# Altium PCB Flight_Controller.PcbDoc
Units mil, origin at the board's own origin, x right, y up, seen from the top; angles counter-clockwise.
Board outline 1575 x 1575 mil, 2 copper layers (Top Layer, Bottom Layer); 38 components, 43 nets, 192 pads, 140 vias.
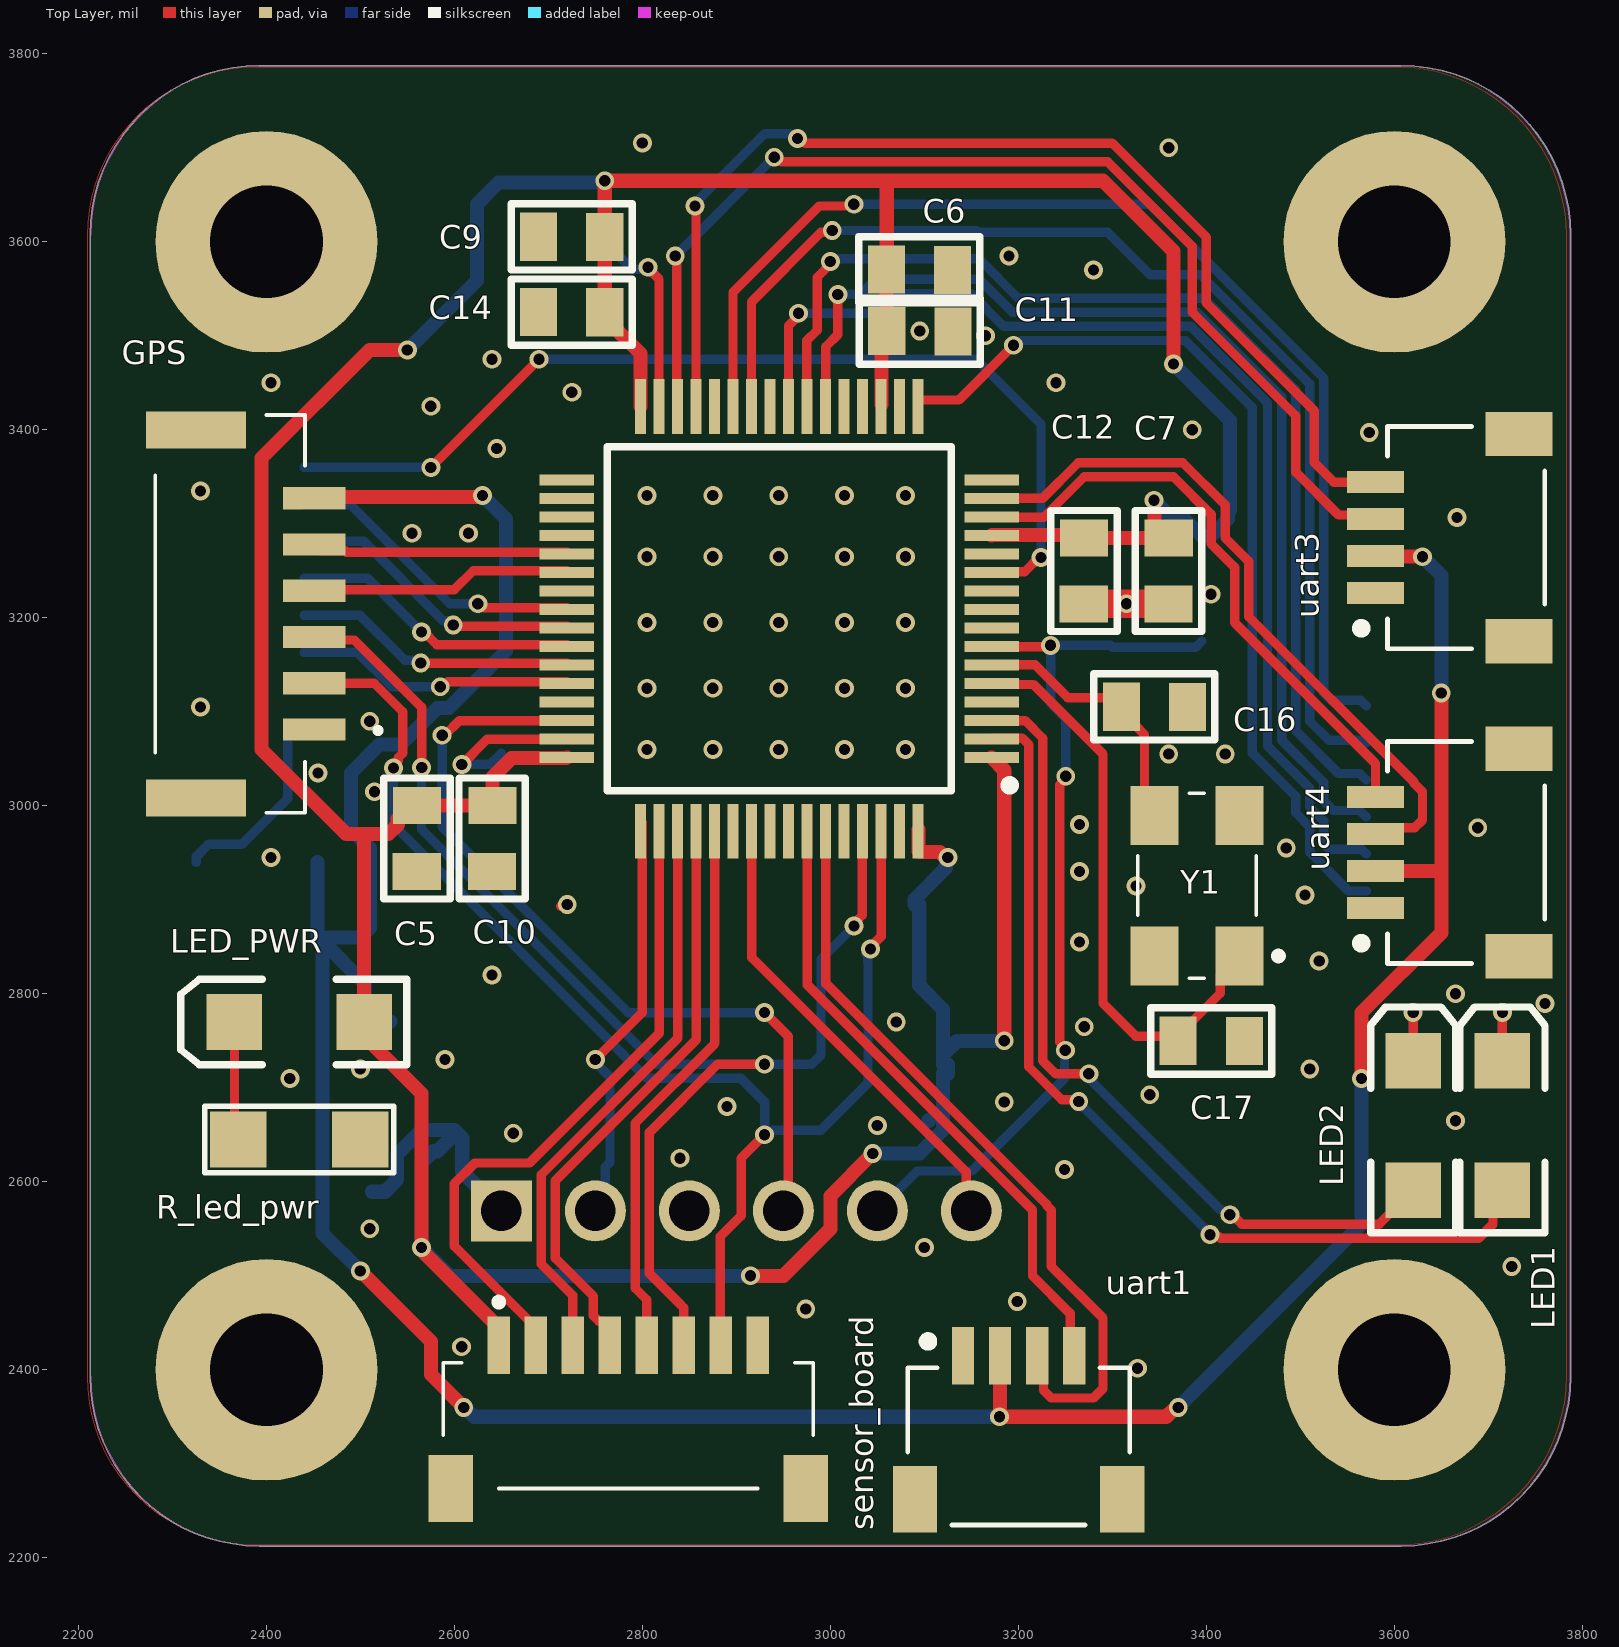
[diagram p0: Top Layer view]
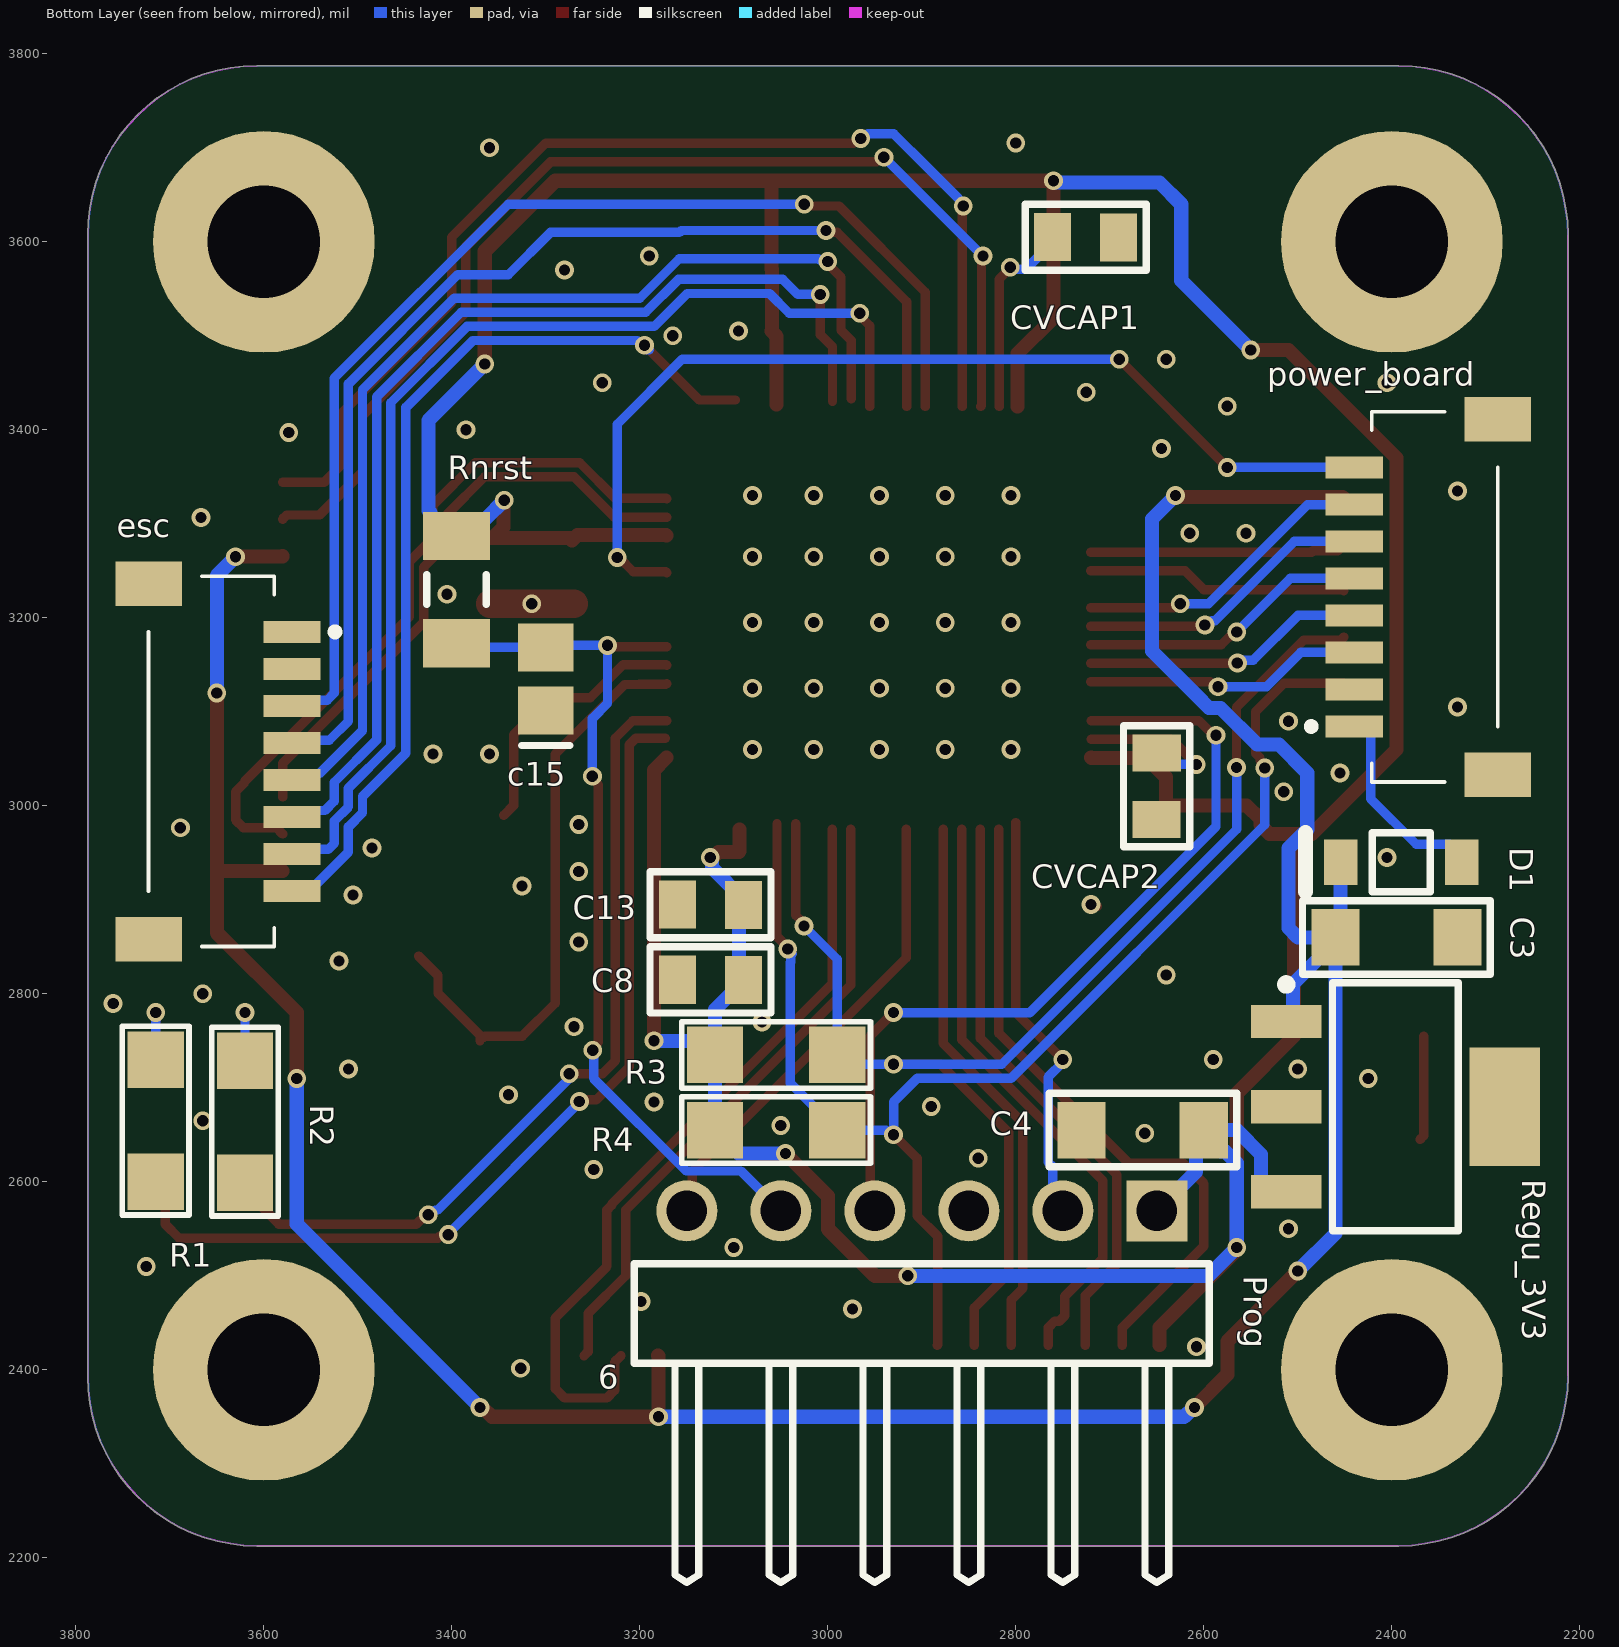
[diagram p1: Bottom Layer view, seen from below]
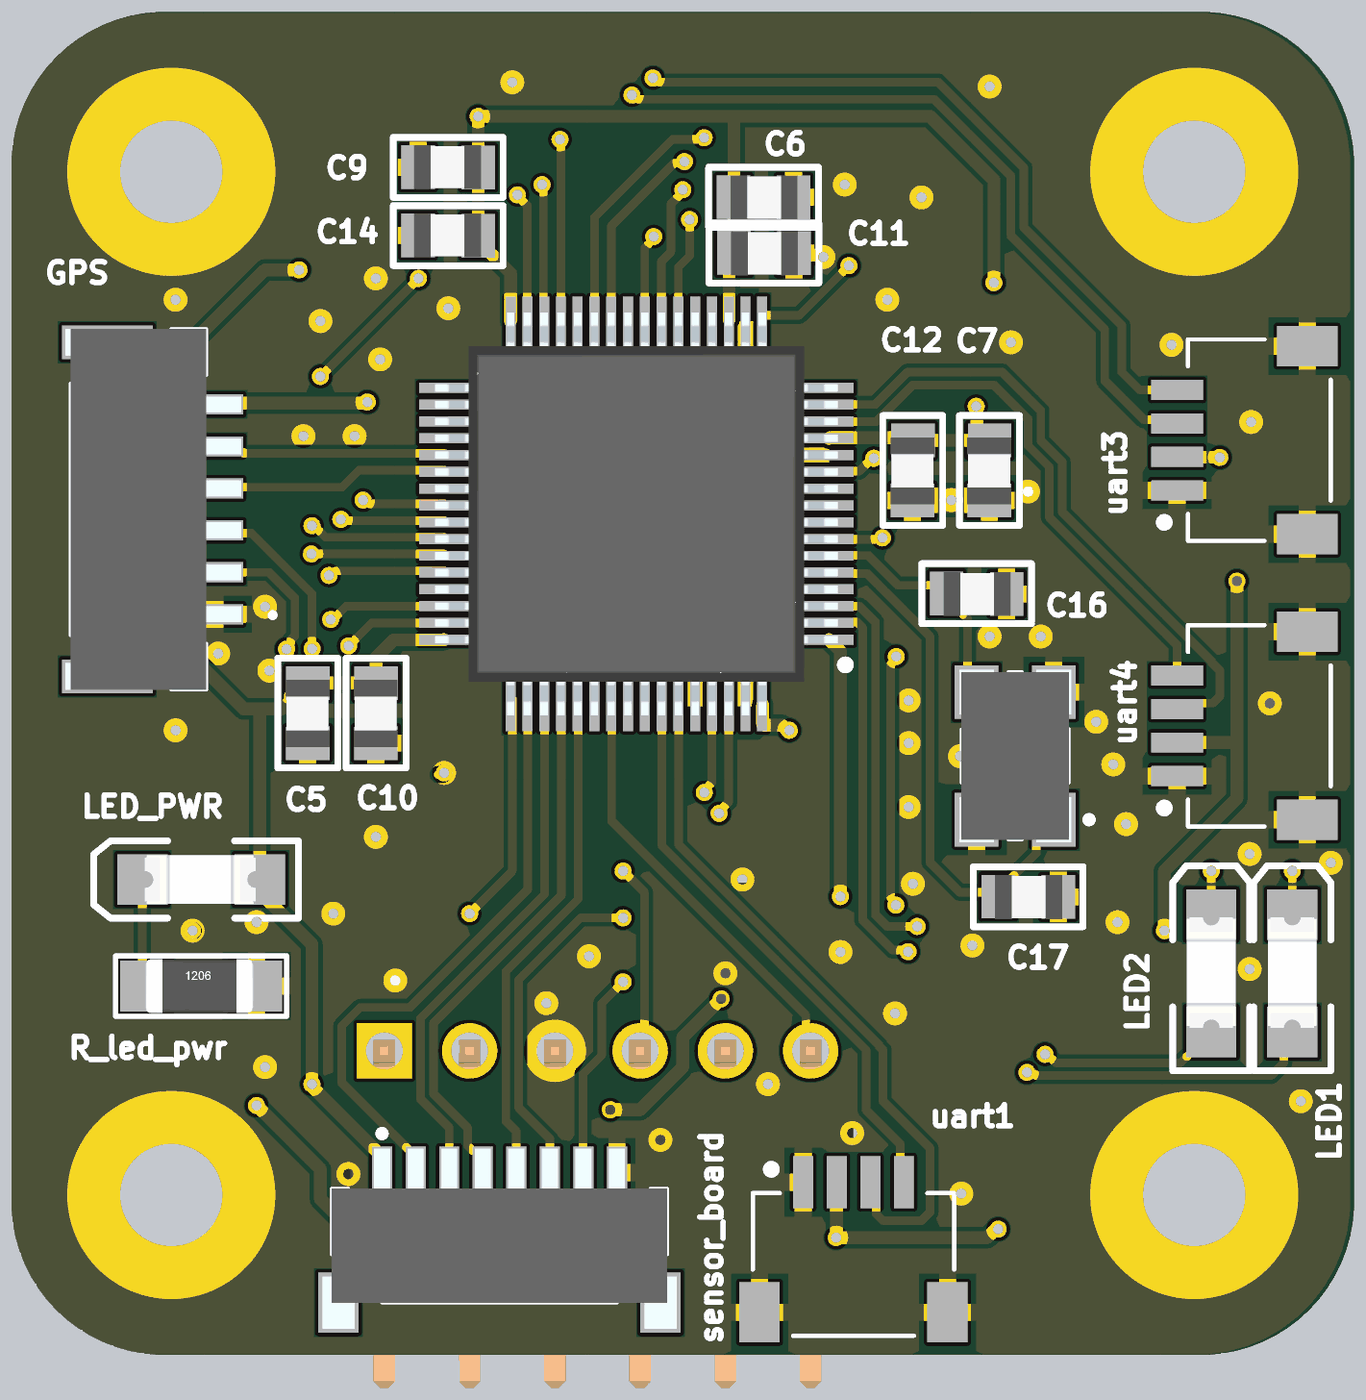
[diagram p2: 3D render of the assembled board from above, using the file's embedded part models]
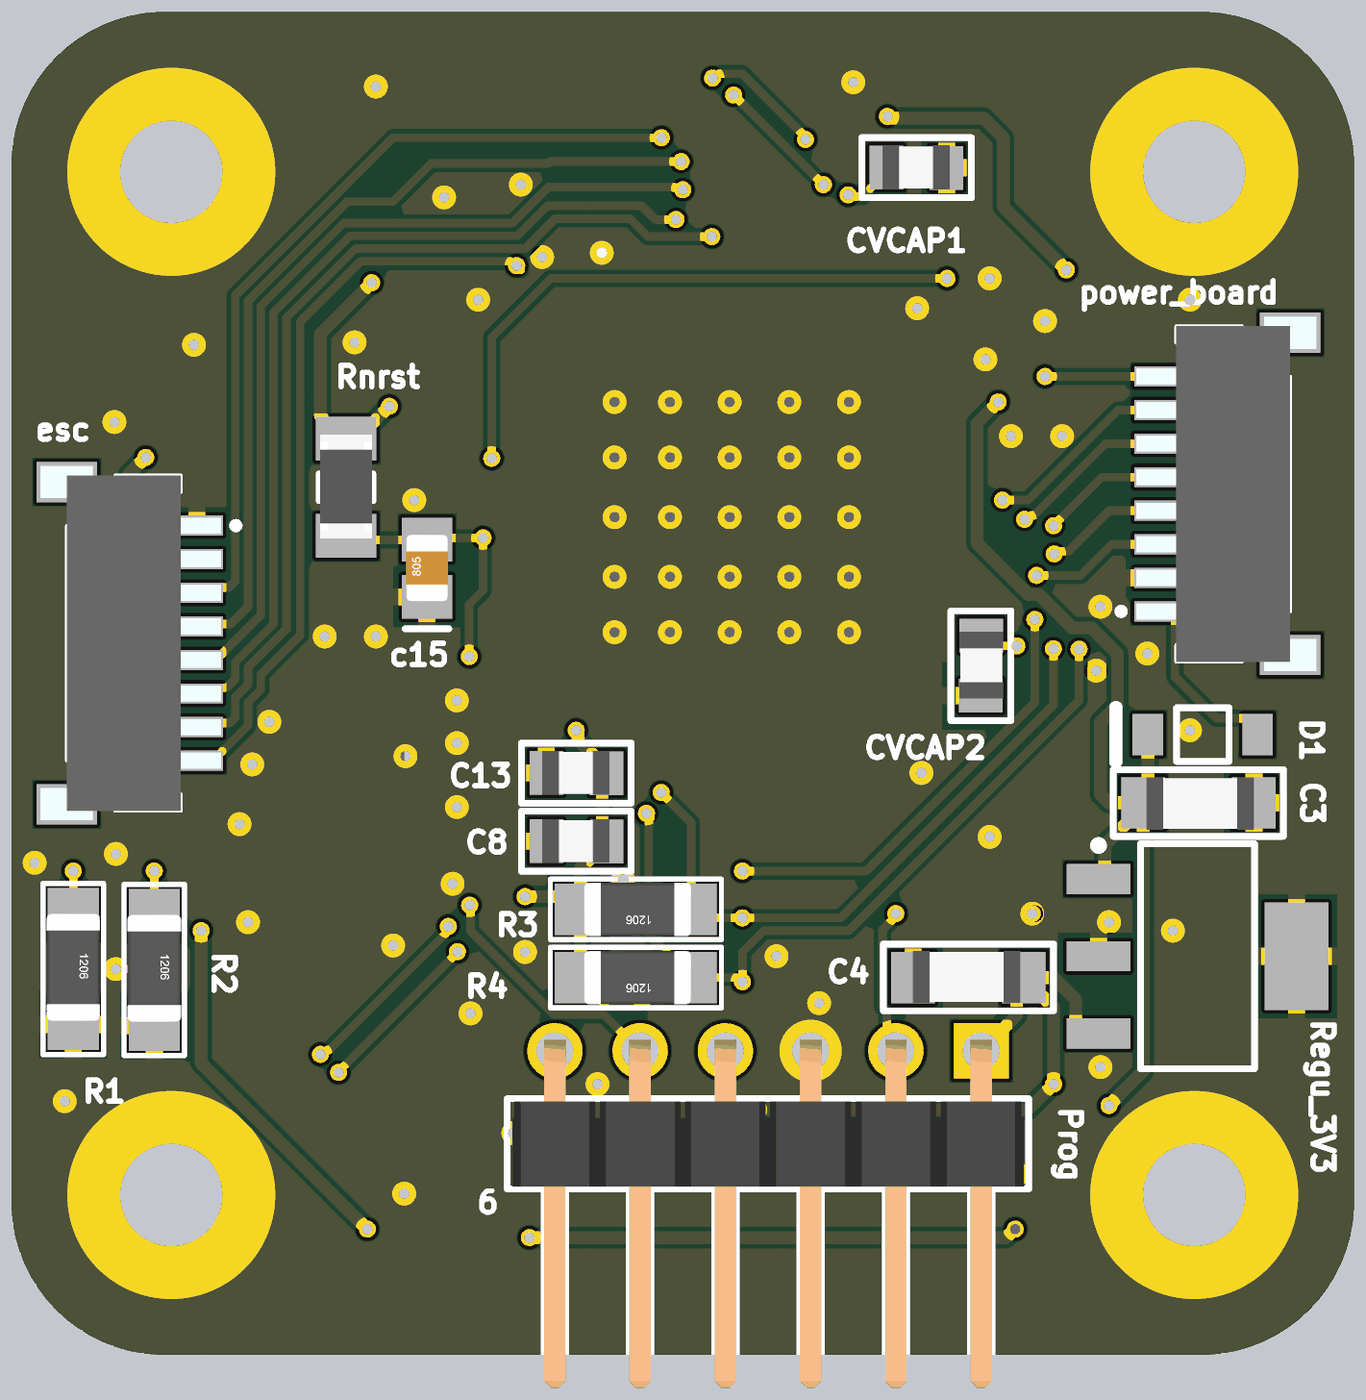
[diagram p3: 3D render of the assembled board from below, using the file's embedded part models]

## Layer stack, top to bottom
Top Solder: solder mask 0.4, Solder Resist, Dk 3.5
Top Layer: signal copper 1.4
Dielectric 1: dielectric 12.6, FR-4, Dk 4.8
Bottom Layer: signal copper 1.4
Bottom Solder: solder mask 0.4, Solder Resist, Dk 3.5

## Board outline
2212.5,2392.5 2212.5,3607.5 cw(c2392.5,3607.5) 2392.5,3787.5 3607.5,3787.5 cw(c3607.5,3607.5) 3787.5,3607.5 3787.5,2392.5 cw(c3607.5,2392.5) 3607.5,2212.5 2392.5,2212.5 cw(c2392.5,2392.5)

## Design rules (kind name [scope] priority, off if disabled: settings)
Clearance [All] p1: gap=5 ignorepadtopadclearanceinfootprint=TRUE
PolygonConnect [All] p1: connectstyle=Relief reliefconductorwidth=10 reliefentries=4 polygonreliefangle="90 Angle" airgapwidth=10
RoutingVias [All] p1: holewidth=12 width=20 viastyle="Through Hole" minholewidth=12 minwidth=20 maxholewidth=28 maxwidth=50
SolderMaskExpansion [All] p1: expansion=4 istentingtop=FALSE
Width [All] p1: maxlimit=30 minlimit=10 preferedwidth=15 minimp=50.000000 maximp=50.000000 favimp=50.000000
30 further rules are at their usual default settings.

## Components (designator, comment, footprint, x,y, rotation, side; value= is the part's Value field where it differs from the comment)
C3 "CMS_1206" CONDENSATEUR_CMS_1206 2330,2860 r0 bottom value=10µF
C4 "CMS_1206" CONDENSATEUR_CMS_1206 2730,2655 r180 bottom value=4.7µF
C5 "CMS_0805" CONDENSATEUR_CMS_0805 2560.39,3000.47 r270 top value=100nF
C6 "CMS_0805" CONDENSATEUR_CMS_0805 3059.53,3570.39 r0 top value=100nF
C7 "CMS_0805" CONDENSATEUR_CMS_0805 3360,3285 r270 top value=100nF
C8 "CMS_0805" CONDENSATEUR_CMS_0805 3089.53,2814.61 r0 bottom value=100nF
C9 "CMS_0805" CONDENSATEUR_CMS_0805 2760,3605 r180 top value=100nF
C10 "CMS_0805" CONDENSATEUR_CMS_0805 2640.39,3000.47 r270 top value=1µF
C11 "CMS_0805" CONDENSATEUR_CMS_0805 3060,3505 r0 top value=1µF
C12 "CMS_0805" CONDENSATEUR_CMS_0805 3270,3285 r270 top value=1µF
C13 "CMS_0805" CONDENSATEUR_CMS_0805 3089.53,2894.61 r0 bottom value=1µF
C14 "CMS_0805" CONDENSATEUR_CMS_0805 2760,3525 r180 top value=1µF
c15 "100nF" C0805_N 3300,3135 r90 bottom
C16 "CMS_0805" CONDENSATEUR_CMS_0805 3309.53,3105.39 r0 top value=17pF
C17 "CMS_0805" CONDENSATEUR_CMS_0805 3370,2750 r0 top value=17pF
CVCAP1 "CMS_0805" CONDENSATEUR_CMS_0805 2690.53,3604.61 r0 bottom value=2.2µF
CVCAP2 "CMS_0805" CONDENSATEUR_CMS_0805 2650.39,2985.53 r90 bottom value=2.2µF
D1 "MBR0520LT1G" ONSC-SOD-123-2-425-04_V 2390,2940 r0 bottom
esc "SM08B-SRSS-TB__LF__SN_" SM08BSRSSTBLFSN 3646.3,3047.2 r270 bottom
GPS "SM06B-GHS-TB__LF__SN_" SM06BGHSTBLFSN 2361.42,3204.13 r270 top (schematic designator GPS?)
LED1 "LED" LED_1206 3715,2660 r90 top
LED2 "LED" LED_1206 3620,2660 r90 top
LED_PWR "LED" LED_1206 2435,2770 r180 top
power_board "SM08B-SRSS-TB__LF__SN_" SM08BSRSSTBLFSN 2363.7,3222.2 r90 bottom
Prog "61300611021" 61300611021 2900,2460 r180 bottom
R1 "RESISTANCE_CMS_1206" RESISTANCE_CMS_1206 3715,2730 r270 bottom value=150
R2 "RESISTANCE_CMS_1206" RESISTANCE_CMS_1206 3620,2728.9 r270 bottom value=150
R3 "RESISTANCE_CMS_1206" RESISTANCE_CMS_1206 2990,2735 r0 bottom value=4.7K
R4 "RESISTANCE_CMS_1206" RESISTANCE_CMS_1206 2990,2655 r0 bottom value=4.7K
R_led_pwr "RESISTANCE_CMS_1206" RESISTANCE_CMS_1206 2370,2645 r0 top value=150
Regu_3V3 "MCP1826S-3302E/DB" SOT-223-DB3_L 2396.14,2680 r180 bottom
Rnrst "100k" R1206_N 3395,3230 r90 bottom
sensor_board "SM08B-SRSS-TB__LF__SN_" SM08BSRSSTBLFSN 2785,2350 r0 top
uart1 "SM04B-SRSS-TB(LF)(SN)" JST_SM04B-SRSS-TB(LF)(SN) 3200.32,2415 r0 top
uart3 "SM04B-SRSS-TB(LF)(SN)" JST_SM04B-SRSS-TB(LF)(SN) 3580,3285.32 r90 top
uart4 "SM04B-SRSS-TB(LF)(SN)" JST_SM04B-SRSS-TB(LF)(SN) 3580,2950.32 r90 top
Y1 "QTC5A8.00000FDT1I20R" QTC5A800000FDT1I20R 3390,2915 r90 top
µC "STM32F405RGT6" QFP50P1200X1200X160-64N 2945.64,3198.91 r180 top

## Footprints (in the part's own frame and the unit in brackets; to place one, negate y for a bottom-side part, rotate by r counter-clockwise, add the part's x,y. Pads: shape width x height; smd on the part's side, far side on the other; paste and mask are expansions set on the pad)
61300611021 [mm] "Pin Header, pitch 2.54 mm, THT, Angled, single row, 6p"
  rect 1.65x1.65 hole 1.1: 1(6.35,2.77)
  round 1.65 hole 1.1: 2(3.81,2.77) 3(1.27,2.77) 4(-1.27,2.77) 5(-3.81,2.77) 6(-6.35,2.77)
  silkscreen extent -7.77,-7.27 7.77,1.35, body extent -7.62,-7.27 7.62,3.09, height 2.58
C0805_N [mm] "Chip Capacitor, Body 2.0x1.3mm, IPC Medium Density"
  rect 1.3x1.5 smd: 1(-0.85,0) 2(0.85,0)
  silkscreen extent -1.8,-0.65 -1.8,0.65, body extent -0.99,-0.63 1.01,0.62, height 0.8
CONDENSATEUR_CMS_0805 [mm] "CONDENSATEUR CMS 0805 ; DIMENSIONS : 2mm x 1.25mm"
  rect 1x1.3 smd: 1(0,0) 2(1.79,-0.01)
  silkscreen extent -0.74,-0.9 2.53,0.89, body extent -0.09,-0.67 1.91,0.64, height 0.73
CONDENSATEUR_CMS_1206 [mil] "CONDENSATEUR CMS 1206 ; DIMENSIONS : 3.2mm x 1.6mm"
  rect 51.18x60 smd: 1(0,0) 2(130,0)
  silkscreen extent -35,-39 165,39, body extent 0,-30 126,31, height 64
JST_SM04B-SRSS-TB(LF)(SN) [mm]
  rect 0.6x1.55 smd: 1(-1.5,0) 2(-0.5,0) 3(0.5,0) 4(1.5,0)
  rect 1.2x1.8 smd: S1(-2.8,-3.875) S2(2.8,-3.875)
  silkscreen extent -3,-4.57 3,0.48
LED_1206 [mm] "SM LED; 2 Flat Leads"
  rect 1.5x1.5 smd: 1(-1.75,0) 2(1.75,0)
  silkscreen extent -2.9,-1.15 3.2,1.15, body extent -1.62,-0.72 1.68,0.73, height 1.36
ONSC-SOD-123-2-425-04_V [mm] "SOD, 2-Leads, Body 2.69x1.6mm"
  rect 0.91x1.22 smd: 1(-1.635,0) 2(1.635,0)
  silkscreen extent -0.78,-0.8 2.59,0.8, body extent -1.35,-0.8 1.35,0.8, height 1.35
QFP50P1200X1200X160-64N [mm]
  rect 1.475x0.3 smd: 1(-5.738,3.75) 2(-5.738,3.25) 3(-5.738,2.75) 4(-5.738,2.25) 5(-5.738,1.75) 6(-5.738,1.25) 7(-5.738,0.75) 8(-5.738,0.25) 9(-5.738,-0.25) 10(-5.738,-0.75) 11(-5.738,-1.25) 12(-5.738,-1.75) 13(-5.738,-2.25) 14(-5.738,-2.75) 15(-5.738,-3.25) 16(-5.738,-3.75) 33(5.738,-3.75) 34(5.738,-3.25) 35(5.738,-2.75) 36(5.738,-2.25) 37(5.738,-1.75) 38(5.738,-1.25) 39(5.738,-0.75) 40(5.738,-0.25) 41(5.738,0.25) 42(5.738,0.75) 43(5.738,1.25) 44(5.738,1.75) 45(5.738,2.25) 46(5.738,2.75) 47(5.738,3.25) 48(5.738,3.75)
  rect 0.3x1.475 smd: 17(-3.75,-5.738) 18(-3.25,-5.738) 19(-2.75,-5.738) 20(-2.25,-5.738) 21(-1.75,-5.738) 22(-1.25,-5.738) 23(-0.75,-5.738) 24(-0.25,-5.738) 25(0.25,-5.738) 26(0.75,-5.738) 27(1.25,-5.738) 28(1.75,-5.738) 29(2.25,-5.738) 30(2.75,-5.738) 31(3.25,-5.738) 32(3.75,-5.738) 49(3.75,5.738) 50(3.25,5.738) 51(2.75,5.738) 52(2.25,5.738) 53(1.75,5.738) 54(1.25,5.738) 55(0.75,5.738) 56(0.25,5.738) 57(-0.25,5.738) 58(-0.75,5.738) 59(-1.25,5.738) 60(-1.75,5.738) 61(-2.25,5.738) 62(-2.75,5.738) 63(-3.25,5.738) 64(-3.75,5.738)
  silkscreen extent -6.35,-4.65 4.65,4.65, body extent -6,-6 6,6, height 1.6
QTC5A800000FDT1I20R [mm]
  rect 1.6x1.3 smd: 1(-1.9,-1.15) 2(1.9,-1.15) 3(1.9,1.15) 4(-1.9,1.15)
  silkscreen extent -2.5,-2.3 2.5,1.6, body extent -2.57,-1.67 2.57,1.67, height 0.9
R1206_N [mm] "Chip Resistor, Body 3.2x1.6mm, IPC Medium Density"
  rect 1.3x1.8 smd: 1(-1.45,0) 2(1.45,0)
  silkscreen extent -0.4,-0.8 0.4,0.8, body extent -1.68,-0.87 1.68,0.87, height 0.71
RESISTANCE_CMS_1206 [mil] "RESISTANCE CMS 1206 ; DIMENSIONS : 3.2mm x 1.6mm"
  rect 60x60 smd: 1(0,0) 2(130,0)
  silkscreen extent -35,-35 165,35, body extent 0,-31 126,31, height 39
SM06BGHSTBLFSN [mm]
  rect 0.6x1.7 smd: 1(3.125,2.275) 2(1.875,2.275) 3(0.625,2.275) 4(-0.625,2.275) 5(-1.875,2.275) 6(-3.125,2.275)
  rect 1x2.7 smd: MP1(4.975,-0.925) MP2(-4.975,-0.925)
  silkscreen extent -5.38,-2.02 5.38,4.05, body extent -5.38,-2.17 5.38,3.07, height 4.35
SM08BSRSSTBLFSN [mm]
  rect 0.6x1.55 smd: 1(-3.5,1.938) 2(-2.5,1.938) 3(-1.5,1.938) 4(-0.5,1.938) 5(0.5,1.938) 6(1.5,1.938) 7(2.5,1.938) 8(3.5,1.938)
  rect 1.2x1.8 smd: MP1(-4.8,-1.938) MP2(4.8,-1.938)
  silkscreen extent -5,-1.94 5,3.2, body extent -5.28,-2.72 5.28,2.65, height 3
SOT-223-DB3_L [mm] "SOT223, 4-Leads, Body 6.5x3.5mm, Pitch 2.3mm, Lead Span 7mm, IPC High Density"
  rect 1.9x0.9 smd: 1(-2.95,2.3) 2(-2.95,0) 3(-2.95,-2.3)
  rect 1.9x3.2 smd: 4(2.95,0)
  silkscreen extent -3.08,-3.35 1.7,3.42, body extent -1.85,-3.35 1.85,3.35, height 1.8

## Part data
C3 C4: library part CONDENSATEUR_CMS_CER_1206, "CONDENSATEUR CMS CERAMIQUE 1206", Type=CMS_1206
C5 C6 C7 C8 C9 C10 C11 C12 C13 C14 C16 C17 CVCAP1 CVCAP2: library part CONDENSATEUR_CMS_CER_0805, "CONDENSATEUR CMS CERAMIQUE 0805", Type=CMS_0805
c15: library part Condensateur, "Capacitor", LatestRevisionDate=17-Jul-2002, LatestRevisionNote="Re-released for DXP Platform.", PackageReference=RAD-0.3, Published=8-Jun-2000, Publisher="Altium Limited"
D1: library part CMP-004-00003-1, "Schottky Power Rectifier, 20 V, 5.5 A, -65 to 125 degC, 2-Pin SMD, RoHS, Tape and Reel", Case/Package=SOD, Forward Current=5dA, Forward Voltage=3.85dV, Manufacturer="ON Semiconductor", Max Operating Temperature=125°C, Max Surge Current=5.5A, Min Operating Temperature=-65°C, Package Description="2-Pin Surface Mount Device, Body 2.69 x 1.6 mm", Package Quantity=3000, Package Reference=SOD-123-2-425-04, Peak Reverse Current=250uA, Datasheet URL=http://www.onsemi.cn/pub_link/Collateral/MBR0520LT1-D.PDF, Datasheet Version="Rev. 6, 01/2012", Elements=1, Manufacturer URL=http://www.onsemi.com/, Mounting Technology=SM, Packaging=TapeandReel, Pins=2, RoHS Compliant=True
esc power_board sensor_board: "Connector", Arrow Part Number="SM08B-SRSS-TB (LF)(SN)", Manufacturer_Name="JST (JAPAN SOLDERLESS TERMINALS)", Arrow Price/Stock=https://www.arrow.com/en/products/sm08b-srss-tb-lf-sn/jst-manufacturing, Datasheet Link=http://docs-emea.rs-online.com/webdocs/082f/0900766b8082f545.pdf, Height=2.9mm, Manufacturer_Part_Number="SM08B-SRSS-TB (LF)(SN)"
GPS: "Connector", Arrow Part Number="SM06B-GHS-TB (LF)(SN)", Manufacturer_Name="JST (JAPAN SOLDERLESS TERMINALS)", Arrow Price/Stock=https://www.arrow.com/en/products/sm06b-ghs-tb-lf-sn/jst-manufacturing, Datasheet Link=http://www.jst-mfg.com/product/pdf/eng/eGH.pdf, Height=4.25mm, Manufacturer_Part_Number="SM06B-GHS-TB (LF)(SN)"
LED1 LED2 LED_PWR: "Typical LED", LatestRevisionDate=08-Jul-2005, LatestRevisionNote="Mech Layer 1 removed.", PackageReference=LED-1, Published=8-Jun-2000, Publisher="Altium Limited"
Prog: library part CMP-1502-01069-1, "THT Angled Pin Header WR-PHD, Pitch 2.54 mm, Single Row, 6 pins", Contact Resistance=20mOhm, Manufacturer="Wurth Elektronik", Operating Temperature=-40to105degC, Rated Current=3A, Withstanding Voltage=500VAC, Working Voltage=250VAC, Datasheet URL=https://katalog.we-online.de/em/datasheet/6130xx11021.pdf, Gender=Male, Manufacturer URL=http://www.we-online.de, Mounting Technology=THT, Orientation=Angled, Package Reference=61300611021, Packaging=Bag, Part Number=61300611021, Pin Number=6, Pitch=2.54mm, Publisher=WurthElektronik, Row Number=Single
R1 R2 R3 R4 R_led_pwr: "RESISTANCE CMS 1206", Type=CMS_1206
Regu_3V3: library part CMP-0136-00504-1, "1000 mA, Low Voltage, Low Quiescent Current LDO Regulator, 3-Pin SOT-223, Extended Temperature", DatasheetVersion="revA, Aug-2007", PackageDescription="3-Lead Plastic Small Outline Transistor (DB) [SOT-223]", PackageReference=SOT-223-DB3, PackageVersion="revBB, Aug-2009"
Rnrst: library part Resistor, "Resistor", LatestRevisionDate=17-Jul-2002, LatestRevisionNote="Re-released for DXP Platform.", PackageReference=AXIAL-0.5, Published=8-Jun-2000, Publisher="Altium Limited"
uart1 uart3 uart4: "Connector Header Surface Mount, Right Angle 4 position 0.039 _1.00mm_", Package=None, Availability=Unavailable, MF="JST Sales", MP=SM04B-SRSS-TB_LF__SN_, Price=None, SnapEDA_Link=https://www.snapeda.com/parts/SM04B-SRSS-TB%28LF%29%28SN%29/JST%20Sales%20America%20Inc./view-part/557466/?ref=snap
Y1: "Crystal or Oscillator", Manufacturer_Name="QT Quarztechnik", Datasheet Link=https://docs-emea.rs-online.com/webdocs/12f2/0900766b812f2b81.pdf, Height=0.8mm, Manufacturer_Part_Number=QTC5A8.00000FDT1I20R
µC: "Integrated Circuit", Manufacturer_Name=STMicroelectronics, Mouser Part Number=511-STM32F405RGT6, Arrow Part Number=STM32F405RGT6, Arrow Price/Stock=https://www.arrow.com/en/products/stm32f405rgt6/stmicroelectronics?region=nac, Datasheet Link=http://www.st.com/web/en/resource/technical/document/datasheet/DM00037051.pdf, Height=1.6mm, Manufacturer_Part_Number=STM32F405RGT6, Mouser Price/Stock=https://www.mouser.co.uk/ProductDetail/STMicroelectronics/STM32F405RGT6?qs=Z8%252BeY1k3TIKgj7QWsYGpQw%3D%3D

## Free pads (board coordinates)
  round 236 hole 120: 1(2400,2400) 1(2400,3600) 1(3600,2400) 1(3600,3600)

## Via types
v1: diameter 20, hole 12, Top Layer to Bottom Layer, 140 vias

## Nets (pads, with @x,y where several pads share a name; then routed paths per layer and width w, separated by ;. In a path a pad name is that pad's centre, name@x,y a point inside that pad or via, vN(x,y) a via of type N, cw(c..) or ccw(c..) an arc to the next point about the centre after c; other vN are vias at no path point)
3V3: C4.2 C5.1 C6.1 C7.1 C8.1 C9.1 C10.1 C11.1 C12.1 C13.1 C14.1 LED_PWR.1 Prog.1 R3.2 R4.2 Regu_3V3.3 Rnrst.2 sensor_board.1 µC.1 µC.13 µC.19 µC.32 µC.48 µC.64 | length 5430.6
  Top Layer w15: v1(2550,3485) 2510,3485 2395,3370 2395,3060 2485,2970 2503.9,2970 ; sensor_board.1 2647.2,2445 2566.91,2525.29 2566.91,2528.09 v1(2565,2530) 2565,2693.9 2503.9,2755 LED_PWR.1 2503.9,2970 ; µC.48 2719.46,3051 2661,3051 2640.39,3030.39 C10.1 C5.1 2554.49,3000.47 2539.8,2985.79 2539.8,2979.88 2529.92,2970 2503.9,2970 ; µC.32 2798,3481.09 2760,3519.09 C14.1 C9.1 v1(2760,3665) 3060,3665 ; v1(2915,2500) 2950,2500 3000,2550 3000,2585 v1(3045,2630) ; µC.19@3054.37,3426.81 3054.37,3499.37 C11.1 3059.53,3505.47 C6.1 3060,3570.87 3060,3665 ; µC.64@3093.74,2975 3093.74,2951.87 3094.65,2950.96 3116.33,2950.96 3122.29,2945 v1(3125,2945) ; µC.1 3185,3037.81 v1(3185,2750) ; µC.13 3172.06,3288 3266.09,3288 C12.1@3272.01,3282.09 ; C12.1 C7.1@3356.39,3285 ; v1(3344.21,3325) 3345,3324.21 3345,3296.39 C7.1@3356.39,3285 ; C7.1 C7.1@3356.39,3285 ; v1@3365,3475 3365,3590 3290,3665 3060,3665
  Bottom Layer w15: Regu_3V3.3 2526.43,2589.45 2539.14,2602.17 2539.14,2629.14 2565,2655 C4.2 ; v1(2550,3485) 2624,3559 2624,3640 2647.09,3663.09 2758.09,3663.09 v1(2760,3665) ; Prog.1 2608.38,2610.68 2608.38,2646.62 C4.2 ; v1(2915,2500) 2595,2500 v1(2565,2530) 2565,2620 2577.5,2632.5 2581.91,2632.5 2600,2650.59 C4.2 ; v1(3045,2630) 3095,2630 R4.2 3120,2715 3125,2715 R3.2@3125,2725 ; C13.1 3089.53,2900.51 3123.09,2934.07 3123.09,2943.09 v1(3125,2945) ; C13.1@3094.53,2894.61 3094.53,2808.7 3120,2783.23 R3.2 ; R4.2@3104.53,2665.47 R4.2@3105,2665 ; R3.2@3120,2725 R3.2 ; v1(3185,2750) 3135,2750 R3.2 ; v1(3344.21,3325) 3364.03,3305.18 3376.91,3305.18 Rnrst.2 3404.84,3287.09 3422.93,3305.18 3422.93,3311.9 3425,3313.96 3425,3410 v1(3365,3470)
5Vin: D1.1 power_board.1 | length 207.1
  Bottom Layer w10: D1.1 2325.63,2946.1 2338.54,2959.02 2374.02,2959.02 2422.6,3007.6 power_board.1@2422.6,3086.18
+5: C3.2 D1.2 GPS.6 Regu_3V3.1 uart1.2 uart3.2 uart4.2 | length 3558.2
  Top Layer w15: GPS.6 2452.4,3328.58 2628.58,3328.58 v1(2630,3330) ; v1(2500,2505) 2575,2430 2575,2395 v1(2610,2360) ; uart1.2 3180.32,2414.68 3180.32,2350.32 v1(3180,2350) 3357.29,2350 3367.29,2360 v1(3370,2360) ; v1(3565,2710) 3565,2780 3650,2865 3650,2930 ; uart4.2 3649.37,2930.63 3650,2930 ; uart3.2 3580.32,3265.32 3629.68,3265.32 v1(3630,3265) ; v1(3650,3120) 3650,2930
  Bottom Layer w15: C3.2@2454.37,2855.63 D1.2 ; C3.2@2460,2855.59 2505,2810.59 2505,2777.83 Regu_3V3.1 Regu_3V3.1@2531.97,2770.55 ; v1(2500,2505) 2459.88,2545.12 2459.88,2859.88 C3.2 2500,2860 2510,2870 2510,2954.8 2490,2974.8 2490,3035 2520.16,3065.16 2543.16,3065.16 2582.19,3104.19 2594.32,3104.19 2607.5,3117.37 2655,3164.87 2655,3305 v1(2630,3330) ; v1(2610,2360) 2610.86,2360 2620.86,2350 v1(3180,2350) ; v1(3370,2360) 3565,2555 v1(3565,2710) ; v1(3630,3265) 3650,3245 v1(3650,3120)
ADC1_IN13: power_board.8 µC.11 | length 1061.3
  Top Layer w10: v1(2575,3360) v1(2690,3475) ; µC.11 3172.33,3248.91 3206.91,3248.91 3222.09,3264.09 v1(3224.09,3264.09)
  Bottom Layer w10: power_board.8 v1(2575,3360) ; v1(2690,3475) 3155,3475 3224.09,3405.91 v1(3224.09,3264.09)
ADC1_IN14: esc.7 µC.24 | length 1202.7
  Top Layer w10: µC.24 2955.48,3510.77 2966,3521.29 v1(2966,3524)
  Bottom Layer w10: v1(2966,3524) 3041,3524 3062,3545 3149.53,3545 3184.53,3510 3383.79,3510 3465,3428.79 3465,3063.79 3510,3018.79 3510,2998.79 3525,2983.79 3525,2960 3531.34,2953.66 3565.12,2953.66 esc.7
GND: C3.1 C4.1 C5.2 C6.2 C7.2 C8.2 C9.2 C10.2 C11.2 C12.2 C13.2 C14.2 c15.1 C16.2 C17.2 CVCAP1.1 CVCAP2.1 esc.1 esc.2 GPS.1 pad.1 power_board.2 Prog.3 R1.2 R2.2 R_led_pwr.2 Regu_3V3.2 Regu_3V3.4 sensor_board.8 uart1.1 uart1.S1 uart1.S2 uart3.1 uart3.S1 uart3.S2 uart4.1 uart4.S1 uart4.S2 Y1.2 Y1.4 µC.12 µC.18 µC.60 µC.63 | length 101.7
  Top Layer w10: v1(2425,2710) v1@2425.86,2710 ; v1@2713.09,2893.09 2718.09,2893.09 v1(2720,2895) ; C12.2 C12.2@3270.08,3215 ; C7.2@3359.13,3215 C7.2
  Top Layer w30: C12.2@3270.08,3215 v1(3315,3215) C7.2@3359.13,3215
  Bottom Layer w10: v1@2587.29,2730 v1(2590,2730)
  other v1: 3326.76,2401.6 2607.76,2424.6 2973.76,2464.6 3198.76,2472.6 3725,2510 3100,2530 2510,2550 3249,2613 2840,2625 2662.76,2651.6 3050,2660 3665,2665 2890,2680 3185,2685 3339.76,2692.6 2500,2720 3510,2720 3270,2765 3070,2770 3760.27,2789.62 3665,2800 2640,2820 3520,2835 3265,2855 3505,2905 3325.27,2914.62 3265,2930 2405,2945 3485,2955 3688.76,2976.6 3265,2980 2515,3015 2455,3035 3360,3055 3420,3055 2805,3060 2875,3060 2945,3060 3015,3060 3080,3060 2510,3090 2330,3105 2805,3125 2875,3125 2945,3125 3015,3125 3080,3125 2805,3195 2875,3195 2945,3195 3015,3195 3080,3195 3405,3225 2805,3265 2875,3265 2945,3265 3015,3265 3080,3265 2555,3290 2615,3290 3666.76,3306.6 2805,3330 2875,3330 2945,3330 3015,3330 3080,3330 2330,3335 2645,3380 3573.36,3397.1 3385,3400 2575,3425 2725,3440 2405,3450 3240,3450 2640,3475 3165,3500 3095,3505 3280,3570 3190,3585 3360,3700 2800,3705
I2C1_SCL: GPS.3 R3.1 sensor_board.6 µC.61 | length 1458.9
  Top Layer w10: GPS.3 2454.1,3176.41 2493.59,3176.41 2565.18,3104.82 v1(2565.18,3040.67) ; sensor_board.6@2844.05,2426.31 2844.05,2465.95 2840,2470 2807.52,2502.48 2807.52,2652.52 2880,2725 v1(2930,2725) ; v1(3025.24,2872.06) 3025.24,2874.77 3034,2883.53 µC.61@3034,2981.06
  Bottom Layer w10: v1(2565.18,3040.67) 2565,3040.49 2565,2975 2815,2725 v1(2930,2725) 2980,2725 R3.1 2990,2836.83 v1@3020.31,2867.14
I2C1_SDA: GPS.2 R4.1 sensor_board.7 µC.62 | length 1435.6
  Top Layer w10: GPS.2 2514.68,3130.32 2545,3100 2545,3055.84 2540.18,3051.02 2540.18,3047.86 2535.18,3042.86 v1(2535.18,3040.16) ; sensor_board.7 2882.83,2426.89 2882.83,2541.81 2905,2563.98 2905,2625 v1(2930,2650) ; v1(3042.6,2847.6) 3042.6,2849.57 3054,2860.97 µC.62@3054,2980.82
  Bottom Layer w10: v1(2535.18,3040.16) 2535.18,2979.82 2805,2710 2905,2710 2930,2685 v1(2930,2650) 2932.71,2650 2937.71,2655 R4.1 3040,2705 3040,2833.28 3039.59,2833.69 3039.59,2840.76 v1@3037.68,2842.68
LED1: LED1.1 µC.2 | length 1000.9
  Top Layer w10: µC.2@3172.91,3072.05 3204.14,3072.05 3211.04,3065.15 3211.04,2722.39 3246.18,2687.25 3262.4,2687.25 v1(3264.31,2685.34) ; v1(3403.79,2543.79) 3405.7,2541.87 3412.77,2541.87 3414.64,2540 3690,2540 3705,2555 3705,2581.1 LED1.1
  Bottom Layer w10: v1(3264.31,2685.34) 3264.31,2684.3 3403.79,2544.82 v1(3403.79,2543.79)
LED2: LED2.1 µC.3 | length 889.3
  Top Layer w10: µC.3 3171.71,3090.47 3207.53,3090.47 3226.04,3071.96 3226.04,2728.6 3239.64,2715 v1(3275,2715) ; v1(3425,2565) 3427.71,2565 3437.71,2555 3583.9,2555 LED2.1
  Bottom Layer w10: v1(3275,2715) 3276.91,2713.09 3276.91,2708.09 3415,2570 3417.29,2570 3422.29,2565 v1(3425,2565)
MPU_CS: sensor_board.2 µC.50 | length 709
  Top Layer w10: sensor_board.2 2686.57,2445 2599.93,2531.65 2599.93,2598.09 2621.84,2620 2680,2620 2818.15,2758.15 µC.50@2818.15,2975
NetCVCAP1_2: CVCAP1.2 µC.31 | length 216.4
  Top Layer w10: v1(2806,3573) 2806,3572 2817.68,3560.32 µC.31
  Bottom Layer w10: CVCAP1.2 2761,3599.09 2789.14,3570.96 2801.25,3570.96 2803.29,3573 v1(2806,3573)
NetCVCAP2_2: CVCAP2.2 µC.47 | length 169.9
  Top Layer w10: v1(2608,3044) 2634.95,3070.95 µC.47
  Bottom Layer w10: v1(2608,3044) 2638,3044 CVCAP2.2
NetLED1_2: LED1.2 R1.1 | length 101.1
  Top Layer w10: LED1.2 v1(3715,2780)
  Bottom Layer w10: R1.1 v1(3715,2780)
NetLED2_2: LED2.2 R2.1 | length 102.2
  Top Layer w10: LED2.2 v1(3620,2780)
  Bottom Layer w10: R2.1 v1(3620,2780)
NetLED_PWR_2: LED_PWR.2 R_led_pwr.1 | length 111.6
  Top Layer w10: LED_PWR.2@2366.1,2755 2366.1,2648.9 R_led_pwr.1
OSC_IN: C17.1 Y1.1 µC.5 | length 624.2
  Top Layer w10: µC.5 3172.45,3129.1 3200.32,3129.1 3200.42,3129 3216,3129 3290,3055 3290,2790 3325,2755 3365,2755 C17.1@3367.05,2752.95 ; C17.1 3370,2755 3370,2755.91 3414.68,2800.59 3414.68,2819.61 Y1.1
OSC_OUT: C16.1 Y1.3 µC.6 | length 278.8
  Top Layer w10: µC.6 3171.85,3150 3217.74,3150 3252.74,3115 C16.1@3305,3115 ; C16.1 3309.53,3099.49 3324.21,3084.8 3325.12,3084.8 3334.25,3075.67 3334.25,3000.28 Y1.3
PC9: power_board.7 µC.40 | length 325.7
  Top Layer w10: v1(2625,3215) 2627.71,3215 2631.96,3210.75 µC.40@2720.2,3210.75
  Bottom Layer w10: power_board.7 2440.28,3320.35 2489.65,3320.35 2595,3215 v1(2625,3215)
PROG_NRST: c15.2 Prog.5 Rnrst.1 µC.7 | length 958.3
  Top Layer w10: µC.7 3171.92,3169 3232.62,3169 v1(3234.31,3170.69) ; v1(3250,2740) 3250,2742.71 3244,2748.71 3244,3022.4 3250.44,3028.83 v1(3250.44,3031.54)
  Bottom Layer w10: Prog.5 3092.48,2611.54 3150.68,2611.54 3249.14,2710 3249.14,2739.14 v1(3250,2740) ; v1(3250.44,3031.54) 3250.44,3092.95 3234.31,3109.08 v1(3234.31,3170.69) 3297.78,3170.69 c15.2 3388.46,3168.46 Rnrst.1@3395,3175
PROG_SWCLK: Prog.2 µC.49 | length 446.7
  Top Layer w10: v1(2750,2730) 2800,2780 µC.49@2800,2982.21
  Bottom Layer w10: v1@2749.82,2729.82 2749.82,2727.12 2765.59,2711.35 2765.59,2620.86 2760.52,2615.78 2760.52,2579.57 Prog.2
PROG_SWDIO: Prog.4 µC.46 | length 884.6
  Top Layer w10: v1(2587,3075) 2589.71,3075 2605.34,3090.64 µC.46 ; v1(2930,2780) 2955,2755 2955,2574.06 Prog.4
  Bottom Layer w10: v1(2587,3075) 2587,2978 2785,2780 v1(2930,2780)
PROG_SWO: Prog.6 µC.55 | length 502.6
  Top Layer w10: µC.55@2916.57,2975 2916.57,2838.43 3144.4,2610.6 3144.4,2574.66 Prog.6
SPI3_MISO: sensor_board.4 µC.52 | length 637.7
  Top Layer w10: sensor_board.4 2765.32,2445 2758.5,2451.81 2753.61,2451.81 2747.76,2457.67 2747.76,2478.46 2707.48,2518.73 2707.48,2601.27 2857.52,2751.31 µC.52@2857.52,2975
SPI3_MOSI: sensor_board.5 µC.53 | length 588.9
  Top Layer w10: sensor_board.5 2804.68,2474.55 2792.48,2486.76 2792.48,2569.05 2792.48,2662.48 2877.2,2747.2 µC.53@2877.2,2975
SPI3_SCK: sensor_board.3 µC.51 | length 622.8
  Top Layer w10: sensor_board.3 2725.94,2479.06 2692.48,2512.52 2692.48,2607.48 2837.83,2752.83 µC.51@2837.83,2975
TIM1_CH1: power_board.6 µC.41 | length 317.6
  Top Layer w10: v1(2598.88,3192.45) 2600.27,3191.06 µC.41@2720.2,3191.06
  Bottom Layer w10: power_board.6 2503.74,3281.26 2588.03,3196.97 2591.66,3196.97 2596.17,3192.45 v1(2598.88,3192.45)
TIM1_CH2: power_board.5 µC.42 | length 309.4
  Top Layer w10: v1(2565,3185) 2567.71,3185 2581.33,3171.38 µC.42@2720.2,3171.38
  Bottom Layer w10: power_board.5 2508.11,3241.89 v1(2565,3185)
TIM1_CH3: power_board.4 µC.43 | length 301.3
  Top Layer w10: v1(2564.3,3151.85) 2564.38,3151.77 2720.12,3151.77 µC.43@2720.2,3151.69
  Bottom Layer w10: power_board.4 2499.77,3202.52 2547.29,3155 2558.45,3155 2561.6,3151.85 v1(2564.3,3151.85)
TIM1_CH4: power_board.3 µC.44 | length 297.5
  Top Layer w10: v1(2585,3126.69) 2587.71,3126.69 2593.02,3132.01 µC.44@2720.2,3132.01
  Bottom Layer w10: power_board.3 2496.85,3163.15 2533.31,3126.69 v1(2585,3126.69)
TIM3_CH1: esc.6 µC.22 | length 1150.1
  Top Layer w10: µC.22@2995,3430.35 2995,3488.28 3008,3501.28 v1(3008,3544)
  Bottom Layer w10: v1(3008,3544) 3032,3544 3048,3560 3158.79,3560 3193.79,3525 3390,3525 3480,3435 3480,3070 3525,3025 3525,3005 3535.04,2994.96 3563.19,2994.96 esc.6
TIM3_CH2: esc.5 µC.23 | length 1169.7
  Top Layer w10: µC.23@2975,3432.93 2975,3495 2986,3506 2986,3562.29 3000,3576.29 v1(3000,3579)
  Bottom Layer w10: v1(3000,3579) 3001.91,3580.91 3008.98,3580.91 3010.07,3582 3158,3582 3200,3540 3397.57,3540 3495,3442.57 3495,3080 3540.67,3034.33 3563.19,3034.33 esc.5
TIM3_CH3: esc.4 µC.26 | length 1232.6
  Top Layer w10: µC.26 2916.11,3536.11 2990.09,3610.09 3000.09,3610.09 v1(3002,3612)
  Bottom Layer w10: v1(3002,3612) 3155.84,3612 3157.84,3610 3295,3610 3340,3565 3393.79,3565 3510,3448.79 3510,3090.03 3530.35,3069.69 3567.2,3069.69 esc.4
TIM3_CH4: esc.3 µC.27 | length 1251.3
  Top Layer w10: µC.27 2896.43,3546.43 2988.09,3638.09 3023.09,3638.09 v1(3025,3640)
  Bottom Layer w10: v1(3025,3640) 3340,3640 3525,3455 3525,3120 3532.6,3112.4 3563.86,3112.4 esc.3
UART1_RX: uart1.3 µC.59 | length 827.4
  Top Layer w10: µC.59@2995.32,2975 2995.32,2810.9 3230,2576.21 3230,2575 3235,2570 3235,2510 3290,2455 3290,2380 3280,2370 3235,2370 3226.77,2378.23 3226.77,2408.23 uart1.3
UART1_TX: uart1.4 µC.58 | length 677.5
  Top Layer w10: µC.58@2975.63,2975 2975.63,2809.37 3215,2570 3215,2500 3255,2460 3255,2419.37 uart1.4
UART2_RX: esc.8 µC.17 | length 988.3
  Top Layer w10: µC.17@3098.66,3431.73 3136.73,3431.73 v1(3194.92,3489.92)
  Bottom Layer w10: v1@3190,3485 3192.71,3485 3202.71,3495 3377.57,3495 3448.79,3423.79 3448.79,3056.21 3495,3010 3495,2992.57 3510,2977.57 3510,2950.71 3551.3,2909.41 esc.8
UART3_RX: uart3.3 µC.30 | length 1185.3
  Top Layer w10: v1(2835,3585) 2836.46,3583.54 2836.46,3425.72 µC.30 ; v1(2940.36,3690) 2943.06,3690 2948.06,3685 3295,3685 3385,3595 3385,3525 3495,3415 3495,3355 3540.69,3309.31 3575.69,3309.31 uart3.3
  Bottom Layer w10: v1(2835,3585) 2835.18,3585 2940.18,3690 v1(2940.36,3690)
UART3_TX: uart3.4 µC.29 | length 1198.1
  Top Layer w10: v1(2856,3638) 2857.06,3636.94 µC.29 ; v1(2965,3710) 2967.71,3710 2972.71,3705 3300,3705 3400,3605 3400,3535 3515,3420 3515,3364.93 3535.56,3344.37 uart3.4
  Bottom Layer w10: v1(2856,3638) 2856,3640.71 2861,3645.71 2861,3646 2893.96,3678.96 2930,3715 2957.29,3715 2962.29,3710 v1(2965,3710)
UART4_RX: uart4.3 µC.15 | length 761.1
  Top Layer w10: µC.15 3171.68,3327 3225.79,3327 3263.79,3365 3375,3365 3420,3320 3420,3285 3445,3260 3445,3201.21 3620.51,3025.7 3620.51,3024.49 3630,3015 3630,2985 3621.81,2976.81 3586.81,2976.81 uart4.3
UART4_TX: uart4.4 µC.14 | length 641
  Top Layer w10: µC.14 3171.72,3307 3227,3307 3270,3350 3365,3350 3405,3310 3405,3278.79 3430,3253.79 3430,3195 3580,3045 uart4.4
UART6_RX: GPS.4 µC.38 | length 278.1
  Top Layer w10: GPS.4 2452.24,3230 2600,3230 2620,3250 2720.08,3250 µC.38@2720.2,3250.12
UART6_TX: GPS.5 µC.37 | length 272.6
  Top Layer w10: GPS.5 2457.8,3271.14 2483.97,3271.14 2485.31,3269.8 µC.37@2720.2,3269.8
pads on no net: esc.MP1 esc.MP2 GPS.MP1 GPS.MP2 power_board.MP1 power_board.MP2 sensor_board.MP1 sensor_board.MP2 µC.4 µC.8 µC.9 µC.10 µC.16 µC.20 µC.21 µC.25 µC.28 µC.33 µC.34 µC.35 µC.36 µC.39 µC.45 µC.54 µC.56 µC.57

## Polygon pours and split planes (outlines as drawn)
GND on Top Layer "NONET_L01_P000" (solid, remove dead copper, shelved, pour order 0): 2209.79,3606.2 cw(c2389.79,3606.2) 2389.79,3786.2 3602.79,3786.2 cw(c3602.79,3606.2) 3782.79,3606.2 3782.79,2393.2 cw(c3602.79,2393.2) 3602.79,2213.2 2389.79,2213.2 cw(c2389.79,2393.2) 2209.79,2393.2
GND on Bottom Layer "NONET_L02_P001" (solid, remove dead copper, shelved, pour order 1): 2213,3607 cw(c2393,3607) 2393,3787 3607,3787 cw(c3607,3607) 3787,3607 3787,2393 cw(c3607,2393) 3607,2213 2393,2213 cw(c2393,2393) 2213,2393

## Keep-outs
Keep-Out Layer:
  lines w0: 2213,3161 2213,3607.06 cw(c2393,3607.06) 2393,3787.06 3607,3787.06 cw(c3607,3607.06) 3787,3607.06 3787,2393 cw(c3607,2393) 3607,2213 2393,2213 cw(c2393,2393) 2213,2393 2213,3206

## Silkscreen, mask and mechanical layers (free items; w line width, h text height)
Mechanical 15:
  the board outline again, w10

## Text inside footprints (layer, text, board x,y; h text height)
Prog: Bottom Overlay "6" at 3244.44,2379.61 h25